# EAGLE board birth1.brd2.brd3 (EAGLE 7.3.0)
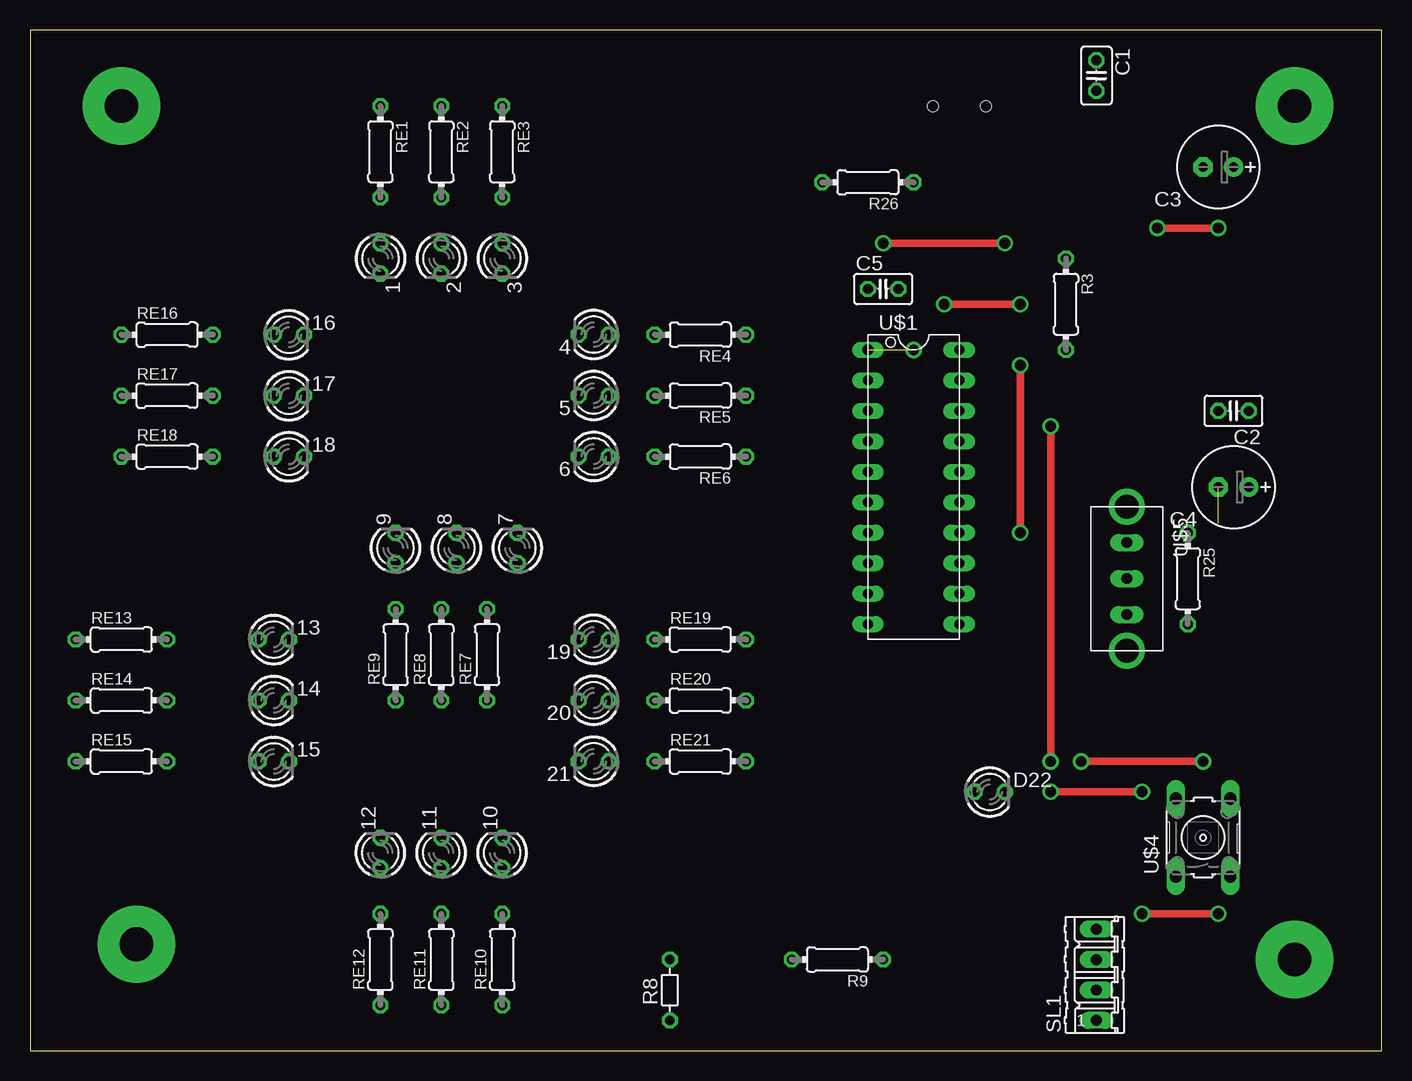
[diagram p0: board, top side]
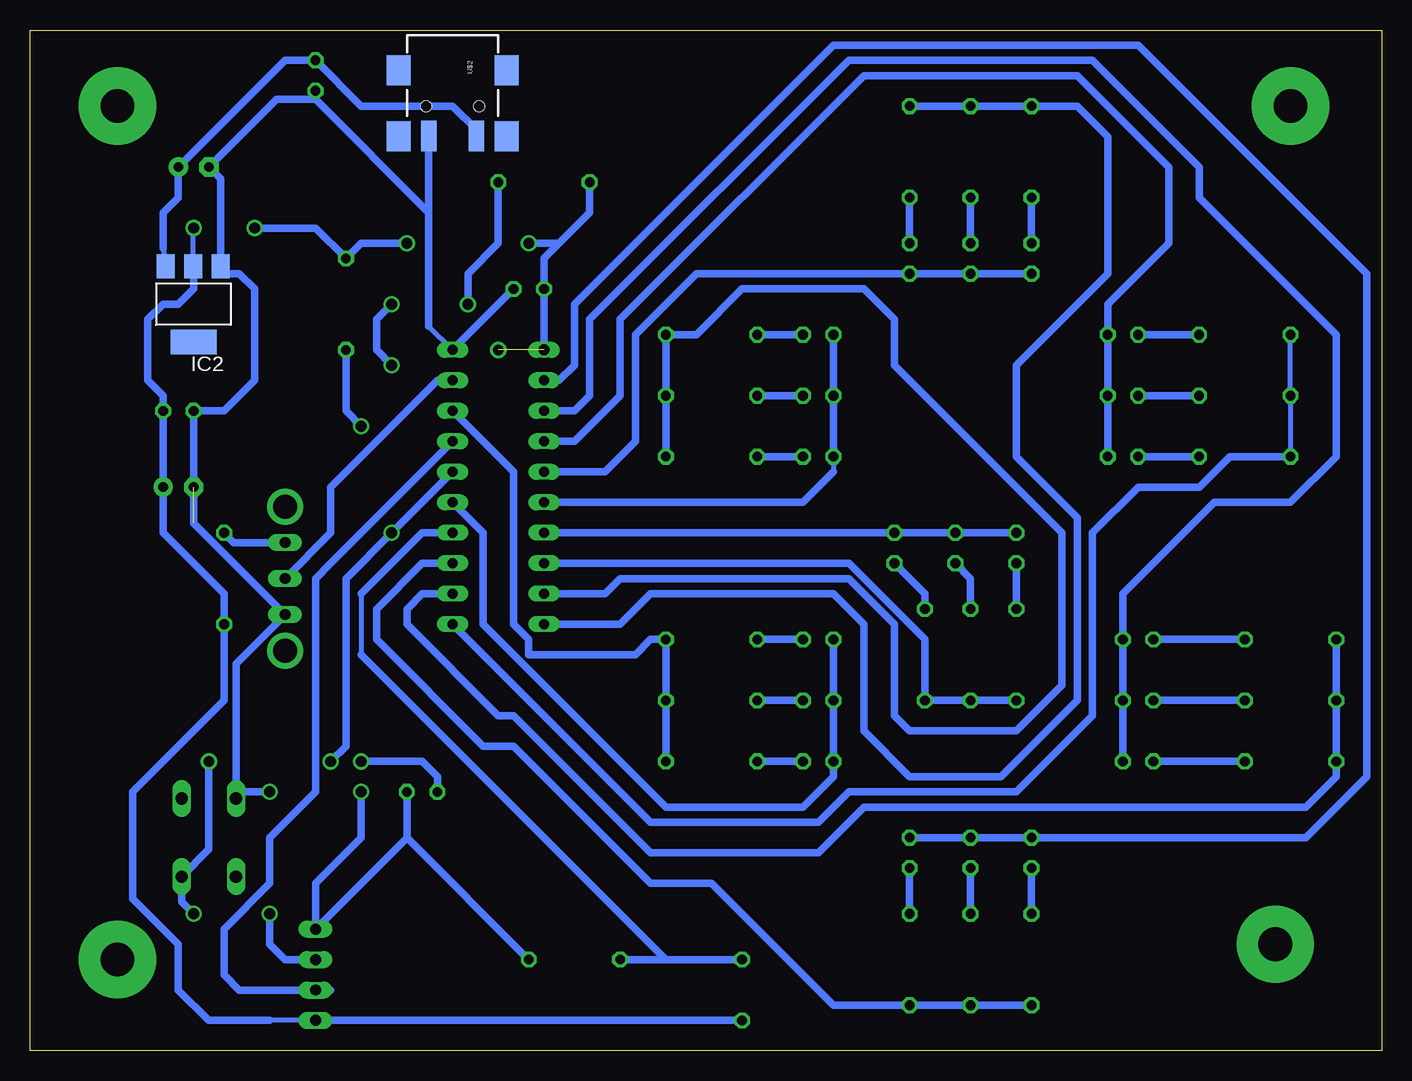
[diagram p1: board, bottom side, seen from below]

Size 112.7 x 85.08 mm. Coordinates in mm from the lower left corner, seen from the top.
Outline: 0,0 112.7,0 112.7,85.08 0,85.08 0,0
Copper layers (1*16): Top 0.035mm / dielectric 1.5mm / Bottom 0.035mm
Design rules "default *": minimum track width 10mil, minimum drill 24mil, track to track 8mil, track to pad 8mil, pad to pad 8mil, via to via 8mil, smd to smd 8mil, copper to edge 40mil, drill to drill 9mil, minimum pad ring 10mil, minimum via ring 8mil, stop-mask expansion 4mil, vias tented up to drill 0mil, thermal gap 10mil
Net classes: 0 default: width 0.61 mm

## Footprints (pad centres in the part's own frame; a part is rotated, then mirrored left to right if it is on the bottom)
LED3MM = drill 0.813 octagon: A -1.27,0; K 1.27,0
C025-025X050 = drill 0.813 octagon: 1 -1.27,0; 2 1.27,0
E2,5-7 = drill 0.813 pad 1.6: + -1.27,0 | drill 0.813 pad 1.6 octagon: - 1.27,0
SOT223 = smd 1.499 x 2.007: 1 -2.261,-3.15; 2 0.025,-3.15; 3 2.311,-3.15 | smd 3.81 x 2.007: 4 0,3.15
0204/7 = drill 0.813 octagon: 1 -3.81,0; 2 3.81,0
R-5 = drill 0.813 octagon: 1 -2.54,0; 2 2.54,0
04P = drill 0.914 long: 1 -3.81,0; 2 -1.27,0; 3 1.27,0; 4 3.81,0
G2553-DIP20 = drill 0.813 long: 1 -10.165,-3.81; 2 -7.625,-3.81; 3 -5.085,-3.81; 4 -2.545,-3.81; 5 -0.005,-3.81; 6 2.535,-3.81; 7 5.075,-3.81; 8 7.615,-3.81; 9 10.155,-3.81; 10 12.695,-3.81; 11 12.695,3.81; 12 10.155,3.81; 13 7.615,3.81; 14 5.075,3.81; 15 2.535,3.81; 16 -0.005,3.81; 17 -2.545,3.81; 18 -5.085,3.81; 19 -7.625,3.81; 20 -10.165,3.81
USB(POWER) = smd 2.54 x 1.27: GND 2.5,-1.981; VBUS 2.5,1.981 | smd 2.5 x 2: GND@1 -3,-4.5; GND@2 -3,4.5; GND@3 2.5,4.5; GND@4 2.5,-4.5 | hole 0.9: 0,2.2; 0,-2.2
B3F-10XX = drill 1.016 long: 1 -3.251,2.261; 2 3.251,2.261; 3 -3.251,-2.261; 4 3.251,-2.261
BIGSWITCH = drill 0.9 long: 1 -3,0; 2 0,0; 3 3,0 | drill 2 pad 2.184: TAB1 -6,0; TAB2 6,0

## Placement (x,y rotation side)
1  [LED3MM]  29.21,66.04 270 top
2  [LED3MM]  34.29,66.04 270 top
3  [LED3MM]  39.37,66.04 270 top
4  [LED3MM]  46.99,59.69 180 top
5  [LED3MM]  46.99,54.61 180 top
6  [LED3MM]  46.99,49.53 180 top
7  [LED3MM]  40.64,41.91 90 top
8  [LED3MM]  35.56,41.91 90 top
9  [LED3MM]  30.48,41.91 90 top
10  [LED3MM]  39.37,16.51 90 top
11  [LED3MM]  34.29,16.51 90 top
12  [LED3MM]  29.21,16.51 90 top
13  [LED3MM]  20.32,34.29 0 top
14  [LED3MM]  20.32,29.21 0 top
15  [LED3MM]  20.32,24.13 0 top
16  [LED3MM]  21.59,59.69 0 top
17  [LED3MM]  21.59,54.61 0 top
18  [LED3MM]  21.59,49.53 0 top
19  [LED3MM]  46.99,34.29 180 top
20  [LED3MM]  46.99,29.21 180 top
21  [LED3MM]  46.99,24.13 180 top
C1  [C025-025X050]  88.9,81.28 270 top
C2  [C025-025X050]  100.33,53.34 180 top
C3  [E2,5-7]  99.06,73.66 180 top
C4  [E2,5-7]  100.33,46.99 180 top
C5  [C025-025X050]  71.12,63.5 0 top
D22  [LED3MM]  80.01,21.59 0 top
IC2  REG1117  [SOT223]  99.06,62.23 180 bottom
R3  [0204/7]  86.36,62.23 270 top
R8  THERMISTOR-5  [R-5]  53.34,5.08 90 top
R9  [0204/7]  67.31,7.62 180 top
R25  [0204/7]  96.52,39.37 270 top
R26  [0204/7]  69.85,72.39 180 top
RE1  [0204/7]  29.21,74.93 270 top
RE2  [0204/7]  34.29,74.93 270 top
RE3  [0204/7]  39.37,74.93 270 top
RE4  [0204/7]  55.88,59.69 180 top
RE5  [0204/7]  55.88,54.61 180 top
RE6  [0204/7]  55.88,49.53 180 top
RE7  [0204/7]  38.1,33.02 90 top
RE8  [0204/7]  34.29,33.02 90 top
RE9  [0204/7]  30.48,33.02 90 top
RE10  [0204/7]  39.37,7.62 90 top
RE11  [0204/7]  34.29,7.62 90 top
RE12  [0204/7]  29.21,7.62 90 top
RE13  [0204/7]  7.62,34.29 0 top
RE14  [0204/7]  7.62,29.21 0 top
RE15  [0204/7]  7.62,24.13 0 top
RE16  [0204/7]  11.43,59.69 0 top
RE17  [0204/7]  11.43,54.61 0 top
RE18  [0204/7]  11.43,49.53 0 top
RE19  [0204/7]  55.88,34.29 0 top
RE20  [0204/7]  55.88,29.21 0 top
RE21  [0204/7]  55.88,24.13 0 top
SL1  [04P]  88.9,6.35 90 top
U$1  MSP430G2553DIP20  [G2553-DIP20]  73.66,48.26 270 top
U$2  USB(POWER)  [USB(POWER)]  77.47,78.74 270 bottom
U$4  OMRON_SWITCH_10-XX  [B3F-10XX]  97.79,17.78 90 top
U$5  SLIDESWITCH-BIG  [BIGSWITCH]  91.44,39.37 270 top

## Library data of the parts
1-21 D22 = led
C1-C5 = rcl
IC2 U$1 U$2 U$4 U$5 = CEDT_JANUARY_2015_v5
R3 R9 R25 R26 RE1-RE21 = resistor
R8 = varistor
SL1 = con-amp-quick; OC_FARNELL: unknown; OC_NEWARK: unknown

## Nets
GND: C1.2 C2.2 C3.- C4.- C5.2 D22.K IC2.1 R9.1 SL1.4 U$1.20 U$2.GND U$4.2 U$5.3
N$1: 7.K 8.K 9.K U$1.7
N$2: 3.A RE3.2
N$3: 10.K 11.K 12.K U$1.2
N$4: 2.A RE2.2
N$6: RE7.1 RE8.1 RE9.1 U$1.8
N$7: 4.A RE4.2
N$8: 1.K 2.K 3.K U$1.5
N$9: RE1.1 RE2.1 RE3.1 U$1.10
N$10: 4.K 5.K 6.K U$1.6
N$12: 5.A RE5.2
N$13: 13.K 14.K 15.K U$1.3
N$14: 21.A RE21.1
N$15: 16.K 17.K 18.K U$1.4
N$16: SL1.2 U$1.17
N$17: 20.A RE20.1
N$18: RE13.1 RE14.1 RE15.1 U$1.12
N$19: R25.1 U$5.1
N$20: 19.K 20.K 21.K U$1.15
N$21: RE19.2 RE20.2 RE21.2 U$1.18
N$22: R8.2 R9.2 U$1.14
N$23: 1.A RE1.2
N$24: C1.1 C3.+ IC2.3 U$2.VBUS
N$25: D22.A R3.2
N$26: 6.A RE6.2
N$27: RE4.1 RE5.1 RE6.1 U$1.9
N$28: 7.A RE7.2
N$29: 8.A RE8.2
N$30: 9.A RE9.2
N$31: RE10.1 RE11.1 RE12.1 U$1.13
N$32: U$1.19 U$5.2
N$33: RE16.1 RE17.1 RE18.1 U$1.11
N$34: 10.A RE10.2
N$35: 11.A RE11.2
N$36: 12.A RE12.2
N$37: 13.A RE13.2
N$38: 14.A RE14.2
N$39: 15.A RE15.2
N$40: 16.A RE16.2
N$41: 17.A RE17.2
N$42: 18.A RE18.2
N$43: C2.1 C4.+ C5.1 IC2.2 R3.1 R8.1 R25.2 R26.2 SL1.1 U$1.1
N$44: 19.A RE19.1
RST: R26.1 SL1.3 U$1.16 U$4.3

## Tracks (layer width: path | path; a pad name or v marks a point on that pad's centre or on a via)
GND  (via drill 0.9 pad 1.02)  (1 unrouted)
  Top 0.61: v85.09,21.59 v92.71,21.59
  Bottom 0.406: 79.45,60.41 U$1.20 | C1.2 88.9,79.3
  Bottom 0.61: D22.K 81.28,17.78 | 81.28,17.78 SL1.4 88.9,13.97 85.09,17.78 v85.09,21.59 | U$2.GND 79.45,69.85 | 79.45,69.85 88.9,79.3 92.15,79.3 C3.- 96.8,72.67 IC2.1 96.19,64.77 95.25,64.77 93.98,63.5 93.98,55.88 96.52,53.34 C2.2 99.06,43.99 U$5.3 95.53,32.28 U$4.2 94.97,21.59 v92.71,21.59 | R9.1 81.28,17.78 | C5.2 U$1.20 | 79.45,69.85 79.45,60.41
N$1
  Bottom 0.406: U$1.7
  Bottom 0.61: 9.K 8.K 7.K U$1.7
N$2
  Bottom 0.61: 3.A RE3.2
N$3
  Bottom 0.406: 12.K 11.K 10.K | 68.58,55.88 U$1.2
  Bottom 0.61: 68.58,55.88 67.31,57.15 67.31,62.23 45.72,83.82 20.32,83.82 1.27,64.77 1.27,22.86 6.35,17.78 10.K
N$4
  Bottom 0.61: 2.A RE2.2
N$5  (via drill 2.8 pad 6.45)
  other vias: 7.62,78.74
N$6
  Bottom 0.406: U$1.8
  Bottom 0.61: RE9.1 RE8.1 RE7.1 38.1,34.29 44.45,40.64 U$1.8
N$7
  Bottom 0.61: 4.A RE4.2
N$8
  Bottom 0.406: U$1.5
  Bottom 0.61: 1.K 2.K 3.K 57.15,64.77 62.23,59.69 62.23,50.8 64.77,48.26 67.31,48.26 68.58,48.26 U$1.5
N$9
  Bottom 0.406: RE3.1 RE2.1 RE1.1 | U$1.10
  Bottom 0.61: RE3.1 25.4,78.74 22.86,76.2 22.86,64.77 30.48,57.15 30.48,49.53 25.4,44.45 25.4,29.21 31.75,22.86 39.37,22.86 43.18,26.67 43.18,35.56 45.72,38.1 60.96,38.1 63.5,35.56 U$1.10
N$10
  Bottom 0.406: 6.K 45.72,48.26 | U$1.6
  Bottom 0.61: 4.K 5.K 6.K | 45.72,48.26 48.26,45.72 U$1.6
N$11  (via drill 2.8 pad 6.45)
  other vias: 8.89,8.89
N$12
  Bottom 0.61: 5.A RE5.2
N$13
  Bottom 0.406: U$1.3
  Bottom 0.61: 15.K 14.K 13.K 21.59,38.1 13.97,45.72 7.62,45.72 3.81,49.53 3.81,59.69 15.24,71.12 15.24,73.66 24.13,82.55 44.45,82.55 66.04,60.96 66.04,54.61 67.31,53.34 U$1.3
N$14
  Bottom 0.61: RE21.1 21.A
N$15
  Bottom 0.61: 18.K 17.K 16.K 22.86,62.23 17.78,67.31 17.78,73.66 25.4,81.28 43.18,81.28 63.5,60.96 63.5,54.61 67.31,50.8 U$1.4
N$16
  Bottom 0.61: U$1.17 87.63,40.65 87.63,40.64 88.9,39.37 88.9,38.1 88.9,36.83 88.9,21.59 92.71,17.78 92.71,13.97 96.52,10.16 96.52,6.35 95.25,5.08 SL1.2 87.63,5.08
N$17
  Bottom 0.61: 20.A RE20.1
N$18
  Bottom 0.406: RE15.1 RE14.1 RE13.1 | U$1.12
  Bottom 0.61: RE13.1 3.81,22.86 6.35,20.32 43.18,20.32 46.99,16.51 60.96,16.51 72.39,27.94 73.66,27.94 81.28,35.56 81.28,36.83 80.01,38.1 U$1.12
N$19
  Bottom 0.61: U$5.1 95.71,42.37 R25.1
N$20
  Bottom 0.406: 19.K 20.K 21.K
  Bottom 0.61: 19.K 45.72,22.86 48.26,20.32 59.69,20.32 74.93,35.56 74.93,43.19 U$1.15
N$21
  Bottom 0.61: RE21.2 RE20.2 RE19.2 60.96,34.29 62.23,33.02 71.12,33.02 71.12,34.29 72.39,35.56 72.39,48.27 U$1.18
N$22
  Bottom 0.406: 85.09,38.1 85.09,33.02
  Bottom 0.61: R9.2 R8.2 59.69,7.62 85.09,33.02 | U$1.14 80,43.19 85.09,38.1
N$23
  Bottom 0.61: RE1.2 1.A
N$24
  Bottom 0.406: 101.6,66.88 IC2.3 | U$2.VBUS 75.49,76.76
  Bottom 0.61: 101.6,66.88 101.6,69.85 100.33,71.12 C3.+ 91.44,82.55 C1.1 85.09,78.74 77.47,78.74 75.49,76.76
N$25  (via drill 0.9 pad 1.02)
  Top 0.61: v85.09,52.07 v85.09,24.13
  Bottom 0.61: R3.2 86.36,53.34 v85.09,52.07 | v85.09,24.13 80.01,24.13 78.74,22.86 D22.A
N$26
  Bottom 0.61: RE6.2 6.A
N$27
  Bottom 0.406: 66.05,38.11 66.04,38.1
  Bottom 0.61: RE6.1 RE5.1 RE4.1 57.15,59.69 53.34,63.5 43.18,63.5 40.64,60.96 40.64,57.15 26.67,43.18 26.67,30.48 30.48,26.67 39.37,26.67 40.64,27.94 40.64,35.56 44.45,39.37 63.5,39.37 64.77,38.1 66.04,38.1 | U$1.9 66.05,38.11
N$28
  Bottom 0.61: RE7.2 38.1,38.1 7.A
N$29
  Bottom 0.61: RE8.2 34.29,39.37 8.A
N$30
  Bottom 0.61: RE9.2 9.A
N$31
  Bottom 0.406: U$1.13
  Bottom 0.61: RE12.1 RE11.1 RE10.1 45.72,3.81 55.88,13.97 60.96,13.97 72.39,25.4 74.93,25.4 83.82,34.29 83.82,36.83 80.01,40.64 U$1.13
N$32
  Bottom 0.406: U$1.19 78.73,55.89
  Bottom 0.61: 78.73,55.89 87.63,46.99 87.63,43.18 U$5.2
N$33
  Bottom 0.406: RE18.1 RE17.1 RE16.1
  Bottom 0.61: RE18.1 12.7,49.53 15.24,46.99 20.32,46.99 24.13,43.18 24.13,27.94 30.48,21.59 44.45,21.59 46.99,19.05 60.95,19.05 U$1.11
N$34
  Bottom 0.61: RE10.2 10.A
N$35
  Bottom 0.61: RE11.2 11.A
N$36
  Bottom 0.61: RE12.2 12.A
N$37
  Bottom 0.61: RE13.2 13.A
N$38
  Bottom 0.61: RE14.2 14.A
N$39
  Bottom 0.61: RE15.2 15.A
N$40
  Bottom 0.61: 16.A RE16.2
N$41
  Bottom 0.61: 17.A RE17.2
N$42
  Bottom 0.61: 18.A RE18.2
N$43  (via drill 0.6, 0.9 pad 1.02)  (1 unrouted)
  Top 0.406: U$1.1 v69.86,58.43
  Top 0.61: v99.06,68.58 v93.98,68.58 | v71.12,67.31 v81.28,67.31
  Bottom 0.406: IC2.2 99.08,68.55 v99.06,68.58 | SL1.1 92.71,2.54
  Bottom 0.61: R8.1 SL1.1 | U$1.1 C5.1 69.85,66.04 68.58,67.31 | R26.2 66.04,69.85 68.58,67.31 | 68.58,67.31 v71.12,67.31 | v81.28,67.31 85.09,67.31 R3.1 88.9,68.58 v93.98,68.58 | 92.71,2.54 97.79,2.54 100.33,5.08 100.33,8.89 104.14,12.7 104.14,21.59 96.52,29.21 R25.2 96.52,38.1 101.6,43.18 C4.+ C2.1 101.6,54.61 102.87,55.88 102.87,60.96 101.6,62.23 100.33,62.23 99.06,63.5 99.06,65.35 IC2.2
  other vias: 73.66,58.42
N$44
  Bottom 0.61: 19.A RE19.1
N$45  (via drill 2.8 pad 6.45)
  other vias: 105.41,7.62
N$46  (via drill 2.8 pad 6.45)
  other vias: 105.41,78.74
RST  (via drill 0.9 pad 1.02)
  Top 0.61: v76.2,62.23 v82.55,62.23 | v82.55,57.15 v82.55,43.18 | v87.63,24.13 v97.79,24.13 | v99.06,11.43 v92.71,11.43
  Bottom 0.61: v82.55,62.23 83.82,60.96 83.82,58.42 v82.55,57.15 | 80.01,45.72 80.01,45.73 U$1.16 80.01,45.72 | v87.63,24.13 86.36,25.4 86.36,39.37 v82.55,43.18 80.01,45.72 | v97.79,24.13 97.79,16.79 U$4.3 100.05,12.42 v99.06,11.43 | v92.71,11.43 92.71,8.89 91.44,7.62 SL1.3 | R26.1 73.66,67.31 76.2,64.77 v76.2,62.23